# EAGLE board bigboard (EAGLE 6.4)
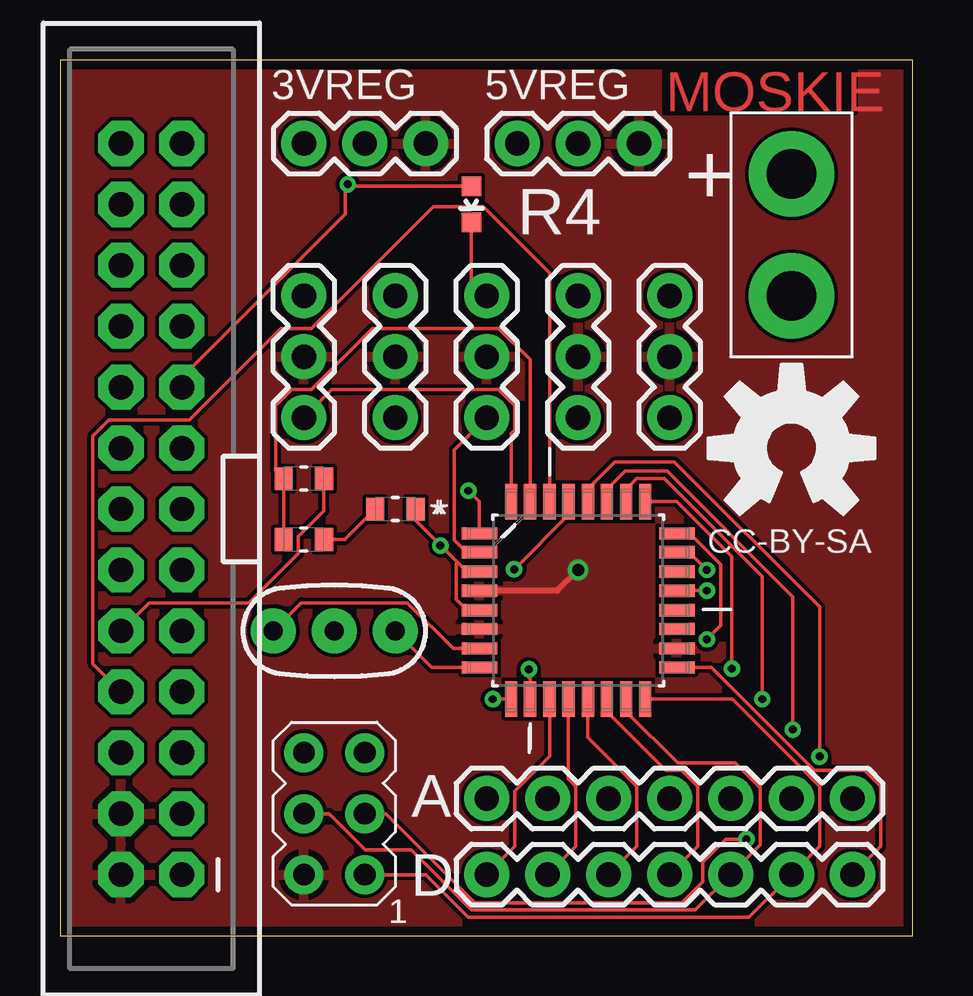
[diagram p0: board, top side]
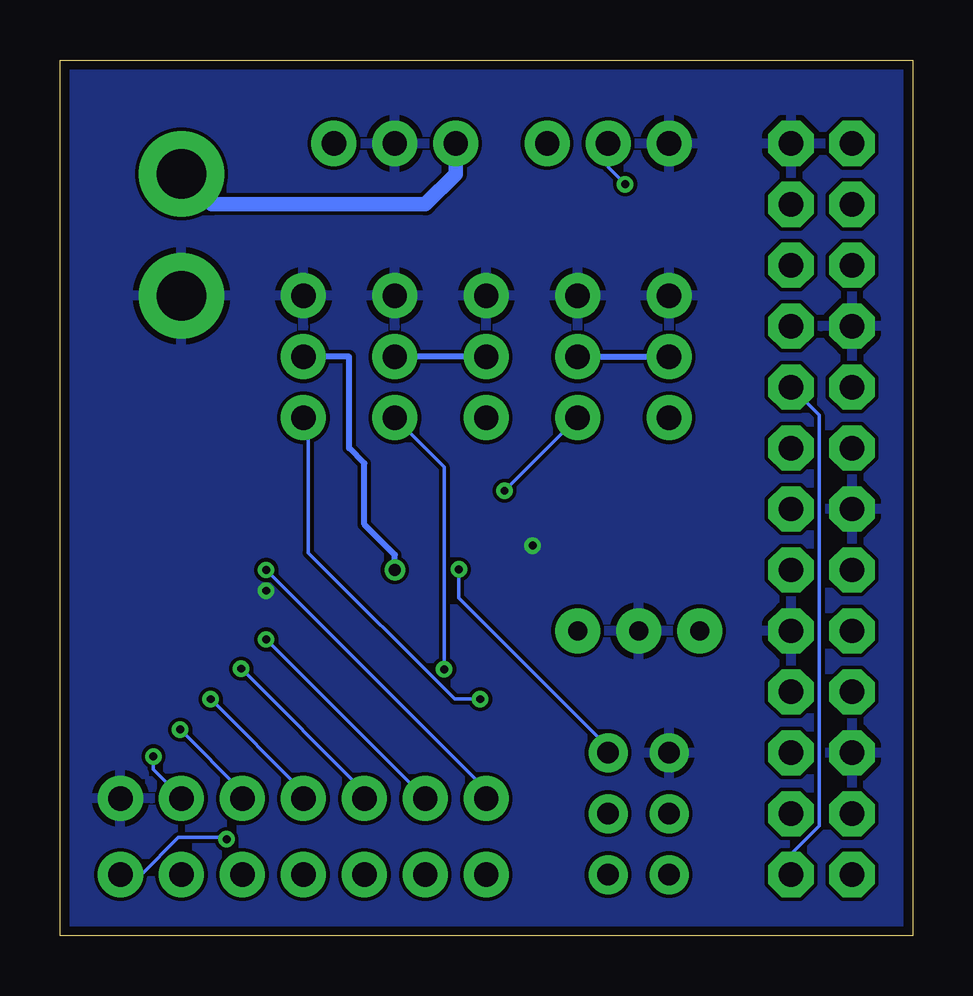
[diagram p1: board, bottom side, seen from below]

Size 35.54 x 36.5 mm. Coordinates in mm from the lower left corner, seen from the top.
Outline: 0,0 35.54,0 35.54,36.5 0,36.5 0,0
Copper layers (1*16): Top 0.0356mm / dielectric 1.5011mm / Bottom 0.0356mm
Design rules "LaenPCBOrder": minimum track width 6mil, minimum drill 13mil, track to track 6mil, track to pad 6mil, pad to pad 6mil, via to via 6mil, smd to smd 6mil, copper to edge 15mil, drill to drill 6mil, minimum pad ring 7mil, minimum via ring 7mil, stop-mask expansion 3mil, vias tented up to drill 0mil, thermal gap 10mil

## Footprints (pad centres in the part's own frame; a part is rotated, then mirrored left to right if it is on the bottom)
1X03 = drill 1.016 pad 1.88: 1 0,0; 2 2.54,0; 3 5.08,0
LED-0603 = smd 0.8 x 0.8: A 0,-0.75; C 0,0.75
AVRISP = drill 0.9 pad 1.626: 1 -1.27,2.54; 2 1.27,2.54; 3 -1.27,0; 4 1.27,0; 5 -1.27,-2.54; 6 1.27,-2.54
2X13-SHROUDED = drill 1.016 pad 1.88 octagon: 1 -1.27,15.24; 2 1.27,15.24; 3 -1.27,12.7; 4 1.27,12.7; 5 -1.27,10.16; 6 1.27,10.16; 7 -1.27,7.62; 8 1.27,7.62; 9 -1.27,5.08; 10 1.27,5.08; 11 -1.27,2.54; 12 1.27,2.54; 13 -1.27,0; 14 1.27,0; 15 -1.27,-2.54; 16 1.27,-2.54; 17 -1.27,-5.08; 18 1.27,-5.08; 19 -1.27,-7.62; 20 1.27,-7.62; 21 -1.27,-10.16; 22 1.27,-10.16; 23 -1.27,-12.7; 24 1.27,-12.7; 25 -1.27,-15.24; 26 1.27,-15.24
1X02_XTRA_BIG = drill 2.057 pad 3.556: 1 -2.54,0; 2 2.54,0
1X07 = drill 1.016 pad 1.88: 1 0,0; 2 2.54,0; 3 5.08,0; 4 7.62,0; 5 10.16,0; 6 12.7,0; 7 15.24,0
RESC1608X60N = smd 0.762 x 0.94: 1 -0.838,0; 2 0.838,0
QFP80P900X900X120-32N = smd 1.473 x 0.508: 1 -4.115,2.794; 2 -4.115,2.007; 3 -4.115,1.194; 4 -4.115,0.406; 5 -4.115,-0.406; 6 -4.115,-1.194; 7 -4.115,-2.007; 8 -4.115,-2.794; 17 4.115,-2.794; 18 4.115,-2.007; 19 4.115,-1.194; 20 4.115,-0.406; 21 4.115,0.406; 22 4.115,1.194; 23 4.115,2.007; 24 4.115,2.794 | smd 0.508 x 1.473: 9 -2.794,-4.115; 10 -2.007,-4.115; 11 -1.194,-4.115; 12 -0.406,-4.115; 13 0.406,-4.115; 14 1.194,-4.115; 15 2.007,-4.115; 16 2.794,-4.115; 25 2.794,4.115; 26 2.007,4.115; 27 1.194,4.115; 28 0.406,4.115; 29 -0.406,4.115; 30 -1.194,4.115; 31 -2.007,4.115; 32 -2.794,4.115
RESONATOR-PTH = drill 0.8 pad 1.88: 1 -2.54,0; 2 0,0; 3 2.54,0

## Placement (x,y rotation side)
3VREG  [1X03]  10.16,33.02 0 top
5VREG  [1X03]  19.05,33.02 0 top
D8  BLUE  [LED-0603]  17.14,30.48 180 top
ISP1  AVRISP-6  [AVRISP]  11.43,5.08 180 top
JP1  RASPBERRYPI-GPIOPTH  [2X13-SHROUDED]  3.81,17.78 180 top
JP2  M02PTH4  [1X02_XTRA_BIG]  30.48,29.21 270 top
JP3  [1X07]  17.78,5.71 0 top
JP4  [1X07]  17.78,2.54 0 top
M1  SMALL_SERVO  [1X03]  10.16,21.59 90 top
M2  SMALL_SERVO  [1X03]  13.97,21.59 90 top
M3  SMALL_SERVO  [1X03]  17.78,21.59 90 top
M4  SMALL_SERVO  [1X03]  25.4,21.59 90 top
M5  SMALL_SERVO  [1X03]  21.59,21.59 90 top
R1  4.7K Ohms  [RESC1608X60N]  10.16,19.05 0 top
R2  4.7K Ohms  [RESC1608X60N]  10.16,16.51 0 top
R3  4.7K Ohms  [RESC1608X60N]  13.97,17.78 180 top
U1  ATMEGA328P-AU  [QFP80P900X900X120-32N]  21.59,13.97 0 top
U$1  [OSHW-LOGO-L]  30.48,20.32 0 top
Y1  [RESONATOR-PTH]  11.43,12.7 0 top

## Library data of the parts
3VREG 5VREG JP2-JP4 = SparkFun-Connectors
D8 = SparkFun-LED; PROD_ID: DIO-08575
ISP1 = adafruit
JP1 = SparkFun-Boards; DIST: sparkfun; DIST_ID: PRT-11490
M1-M5 = SparkFun-Electromechanical
R1-R3 = MoskLib; MPN: CRCW06034K70FKEA; OC_FARNELL: 1469807; OC_NEWARK: 52K8494; SUPPLIER: Vishay; TOLERANCE: ± 1.0 %; WATTAGE: 0.1W
U1 = MoskLib; MPN: ATMEGA328P-AU; OC_FARNELL: 1715486; OC_NEWARK: 68T2935; PACKAGE: TQFP-32; SUPPLIER: Atmel
U$1 = SparkFun-Aesthetics
Y1 = SparkFun-FreqCtrl

## Nets
3V: 3VREG.2 D8.A JP1.1 JP1.17
5V: 3VREG.3 5VREG.3 ISP1.2 JP1.2 JP1.4 M1.2 M2.2 M3.2 M4.2 M5.2 U1.4 U1.6 U1.18
A0: JP3.1 U1.23
A1: JP3.2 U1.24
A2: JP3.3 U1.25
A3: JP3.4 U1.26
A4: JP3.5 U1.27
A5: JP3.6 U1.28
ARX: JP1.8 U1.30
ATX: R1.1 R2.1 U1.31
D2: M1.1 U1.32
D3: M2.1 U1.1
D4: M3.1 U1.2
D5: M4.1 U1.9
D6: M5.1 U1.10
D7: JP4.1 U1.11
D8: JP4.2 U1.12
D9: JP4.3 U1.13
D10: JP4.4 U1.14
D11: ISP1.4 JP4.5 U1.15
D12: ISP1.1 JP4.6 U1.16
D13: ISP1.3 JP4.7 U1.17
GND: 3VREG.1 5VREG.2 D8.C ISP1.6 JP1.6 JP1.9 JP1.14 JP1.20 JP1.25 JP2.2 JP3.7 M1.3 M2.3 M3.3 M4.3 M5.3 R3.1 U1.3 U1.5 U1.21 Y1.2
N$4: U1.19
N$5: U1.22
N$6: U1.20
N$15: R2.2 R3.2
N$33: JP1.3
N$34: JP1.5
N$37: JP1.23
N$38: JP1.21
N$39: JP1.19
N$40: JP1.24
N$41: JP1.26
N$42: JP1.7
N$43: JP1.11
N$44: JP1.12
N$45: JP1.15
N$46: JP1.16
N$47: JP1.18
N$48: JP1.22
N$49: JP1.13
RESET: ISP1.5 U1.29
RRX: JP1.10 R1.2
VIN: 5VREG.1 JP2.1
XTAL1: U1.7 Y1.1
XTAL2: U1.8 Y1.3

## Tracks (layer width: path | path; a pad name or v marks a point on that pad's centre or on a via)
3V  (via drill 0.33)
  Top 0.152: 11.94,31.24 17.14,31.24 D8.A | JP1.17 5.08,23.27 11.89,30.07 11.89,31.19 11.94,31.24 | v11.99,31.32 11.99,31.29 11.94,31.24
  Bottom 0.152: JP1.1 5.08,3.4 3.91,4.57 3.91,21.69 JP1.17 | 3VREG.2 12.7,32.03 v11.99,31.32
5V  (via drill 0.5)
  Top 0.254: U1.4 20.73,14.38 v21.59,15.24
  Bottom 0.254: M2.2 M1.2 | M3.2 M5.2 | v21.59,15.24 21.59,15.88 22.86,17.15 22.86,19.69 23.5,20.32 23.5,24.13 M4.2
  pour Top: -1.27,36.83 -1.27,-7.62 41.91,-7.62 41.91,36.83
A0  (via drill 0.33)
  Top 0.152: U1.23 26.21,15.98 v26.95,15.24
  Bottom 0.152: v26.95,15.24 17.78,6.07 JP3.1
A1  (via drill 0.33)
  Top 0.152: U1.24 26.24,16.76 27.53,15.47 27.53,12.93 v26.95,12.34
  Bottom 0.152: JP3.2 v26.95,12.34
A2  (via drill 0.33)
  Top 0.152: U1.25 25.71,18.09 27.99,15.8 v27.99,11.13
  Bottom 0.152: v27.99,11.13 22.86,5.99 JP3.3
A3  (via drill 0.33)
  Top 0.152: U1.26 23.6,18.62 24.03,19.05 25.17,19.05 29.26,14.96 v29.26,9.85
  Bottom 0.152: v29.26,9.85 25.4,5.99 JP3.4
A4  (via drill 0.33)
  Top 0.152: U1.27 22.78,18.59 23.55,19.35 25.3,19.35 30.53,14.12 v30.53,8.59
  Bottom 0.152: v30.53,8.59 27.94,5.99 JP3.5
A5  (via drill 0.33)
  Top 0.152: U1.28 22,18.62 23.11,19.74 25.6,19.74 31.65,13.69 v31.65,7.47
  Bottom 0.152: v31.65,7.47 31.65,6.93 30.48,5.77 JP3.6
ARX
  Top 0.152: U1.30 20.4,27.61 17.63,30.38 15.55,30.38 10.46,25.3 9.2,25.3 5.38,21.49 2.03,21.49 1.37,20.83 1.37,11.33 JP1.8
ATX
  Top 0.152: R2.1 R1.1 8.99,19.38 8.99,22.1 9.65,22.76 10.46,22.76 13.01,25.3 18.29,25.3 19.58,24 U1.31
D2
  Top 0.152: U1.32 18.8,20.93 18.95,21.08 18.95,22.1 18.29,22.76 11.33,22.76 M1.1
D3  (via drill 0.33)
  Top 0.152: U1.1 17.48,18.09 v17.02,18.54
  Bottom 0.152: M2.1 v17.02,18.54
D4
  Top 0.152: U1.2 16.94,15.98 16.43,16.48 16.43,20.24 M3.1
D5  (via drill 0.33)
  Top 0.152: v18.03,9.85 U1.9
  Bottom 0.152: v18.03,9.85 19.1,9.85 25.2,15.95 25.2,21.39 M4.1
D6  (via drill 0.33)
  Top 0.152: U1.10 19.58,10.72 19.53,10.77 v19.53,11.1
  Bottom 0.152: v19.53,11.1 19.53,19.53 M5.1
D7
  Top 0.152: U1.11 20.4,7.47 18.95,6.02 18.95,3.71 JP4.1
D8
  Top 0.152: U1.12 21.18,6.53 21.49,6.22 21.49,3.71 JP4.2
D9
  Top 0.152: U1.13 22,8.26 24.03,6.22 24.03,3.71 JP4.3
D10
  Top 0.152: U1.14 22.78,9.35 25.25,6.88 25.91,6.88 26.57,6.22 26.57,3.71 JP4.4
D11
  Top 0.152: U1.15 23.6,9.32 25.73,7.19 28.14,7.19 29.18,6.15 29.18,3.79 JP4.5 26.47,1.07 17.14,1.07 14.63,3.58 12.72,3.58 11.23,5.08 ISP1.4
D12
  Top 0.152: U1.16 28.02,9.85 31.65,6.22 31.65,3.71 JP4.6 28.7,0.76 17.02,0.76 15.24,2.54 ISP1.1
D13  (via drill 0.33)
  Top 0.152: U1.17 27.13,11.18 31.42,6.88 33.53,6.88 34.19,6.22 34.19,3.71 JP4.7 | ISP1.3 13.56,5.08 17.27,1.37 25.91,1.37 26.77,2.24 26.77,3.05 27.74,4.01 v28.6,4.01
  Bottom 0.152: v28.6,4.01 28.68,4.09 30.61,4.09 32.16,2.54 JP4.7
GND  (via drill 0.33)
  Top 0.152: R3.1 14.81,17.32 15.86,16.27 | 16.56,15.57 16.97,15.16 U1.3 | 16.56,15.57 15.86,16.27 | U1.5 16.97,13.56 16.51,14.02 16.51,15.52 16.56,15.57 | D8.C 17.14,27.3 M3.3 | v26.95,14.38 U1.21 | v15.85,16.26 15.86,16.27
  pour Bottom: -1.27,36.83 -1.27,-7.62 41.91,-7.62 41.91,36.83
N$15
  Top 0.152: R2.2 11.86,16.51 R3.2
RESET  (via drill 0.33)
  Top 0.152: U1.29 21.18,17.53 v18.92,15.26
  Bottom 0.152: v18.92,15.26 18.92,14.07 12.7,7.85 ISP1.5
RRX
  Top 0.152: R1.2 11,17.7 9.93,16.64 9.93,15.93 7.87,13.87 3.71,13.87 JP1.10
VIN
  Bottom 0.152: 19.05,32.97 5VREG.1 | JP2.1 29.9,31.17
  Bottom 0.61: 19.05,32.97 19.05,31.75 20.32,30.48 29.21,30.48 29.9,31.17
XTAL1
  Top 0.152: U1.7 16.38,11.96 14.48,13.87 10.06,13.87 Y1.1
XTAL2
  Top 0.152: U1.8 15.49,11.18 Y1.3

## Text on the board
Top: MOSKIE
tSilk: CC-BY-SA | D
_tsilk: + | R4 | A